# Altium PCB Main_pcb.PcbDoc
Units mil, origin at the board's own origin, x right, y up, seen from the top; angles counter-clockwise.
Board outline 3140 x 2665 mil, 2 copper layers (Top Layer, Bottom Layer); 26 components, 35 nets, 136 pads, 7 vias.
Unrouted connection lines stored in the file: 1.
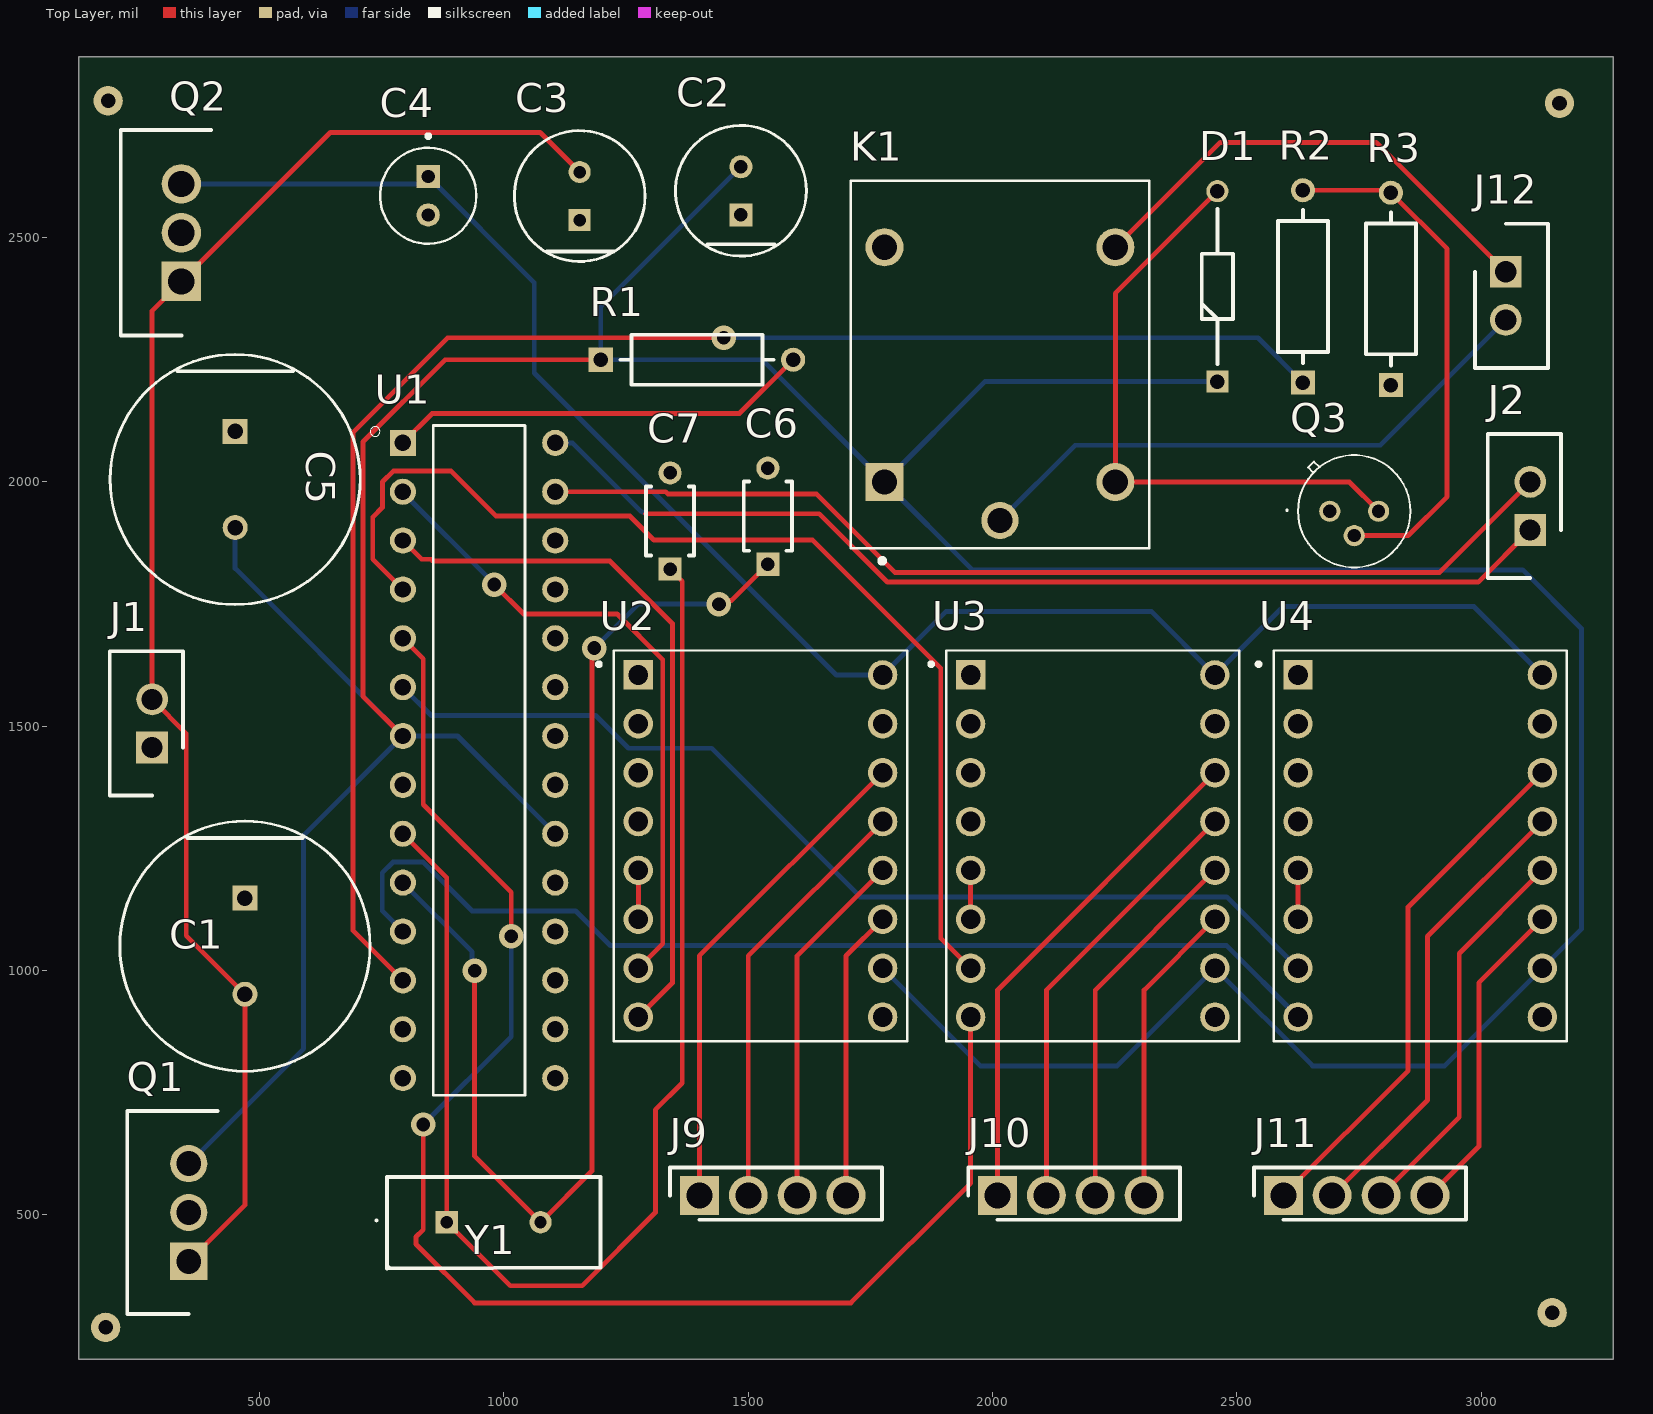
[diagram p0: Top Layer view]
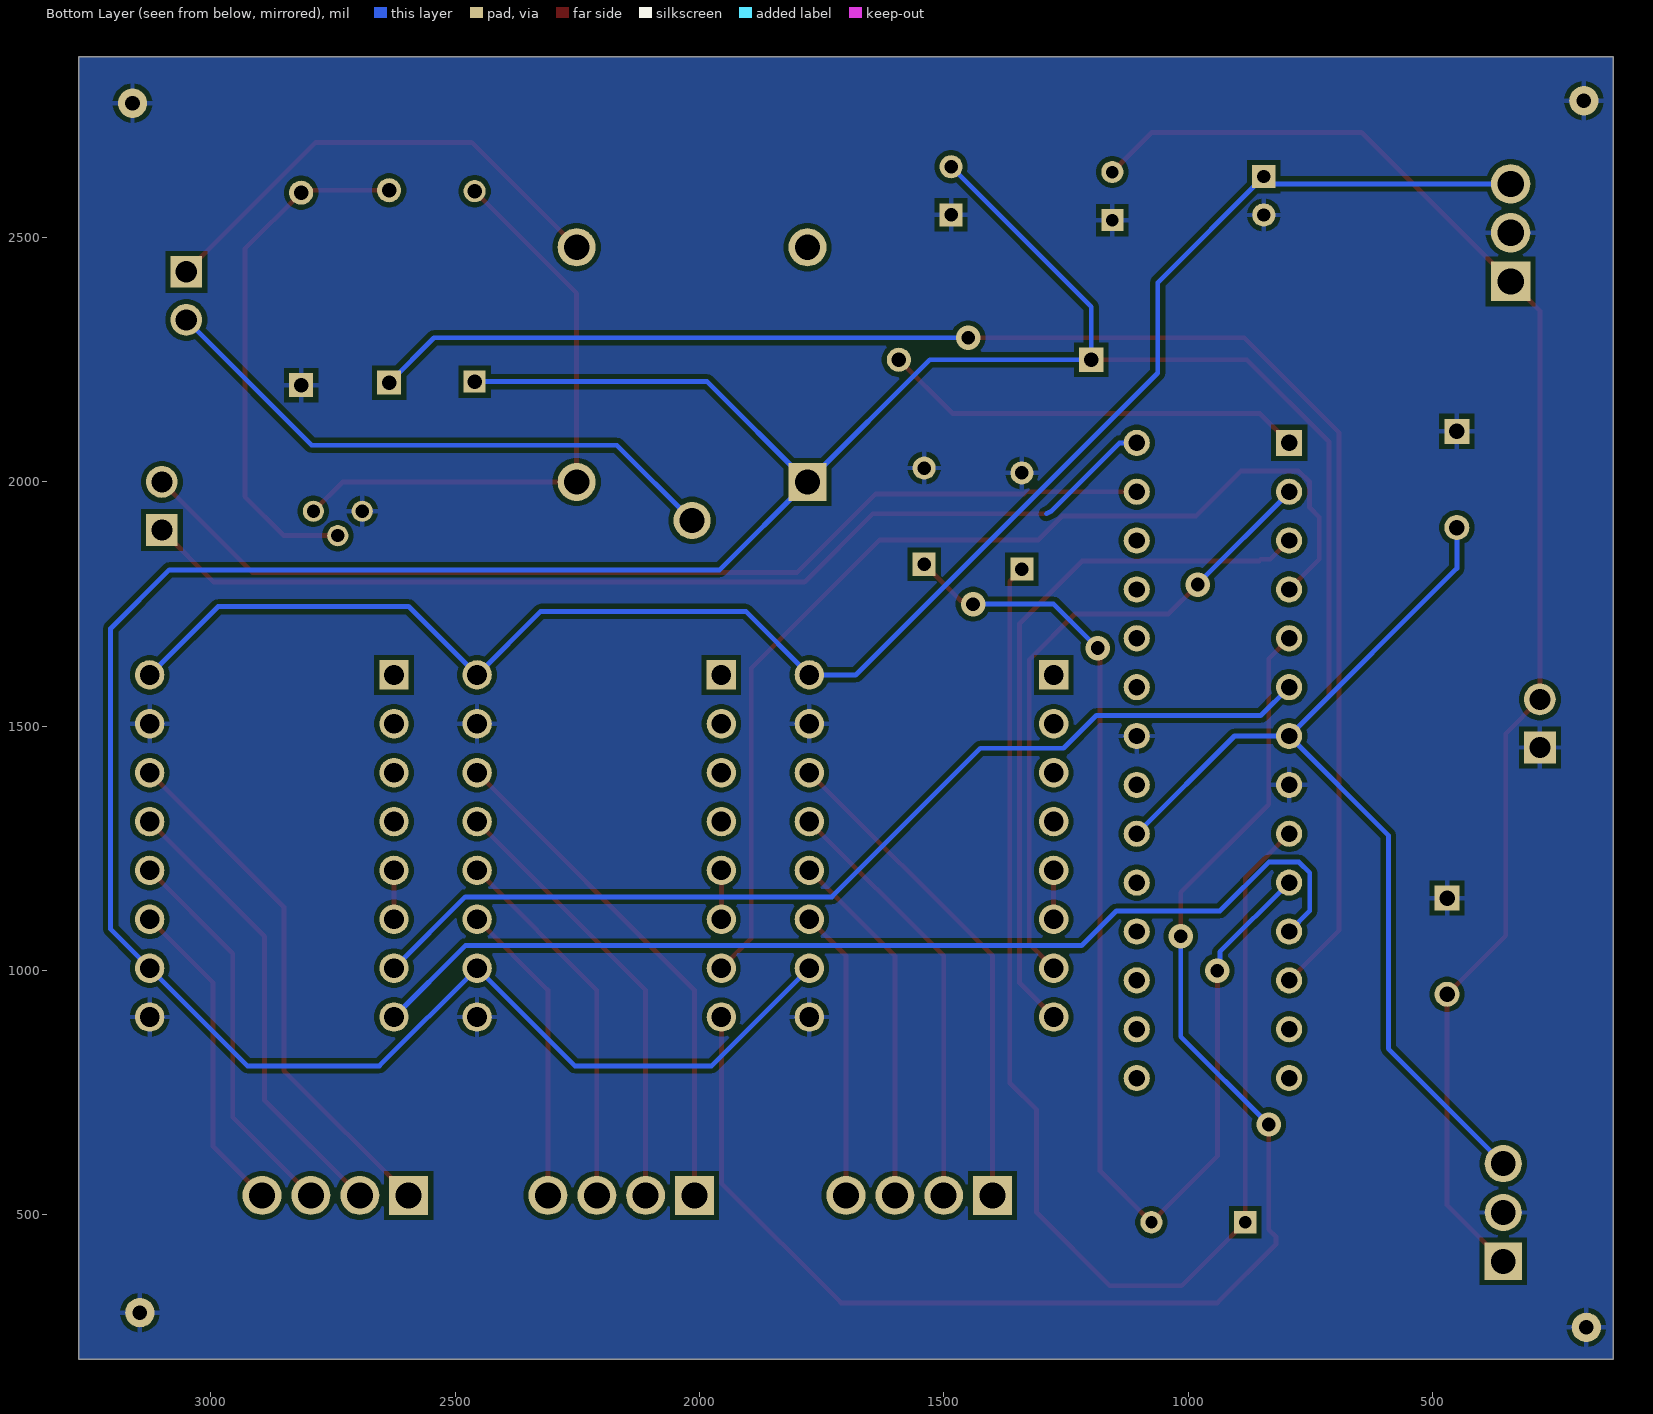
[diagram p1: Bottom Layer view, seen from below]
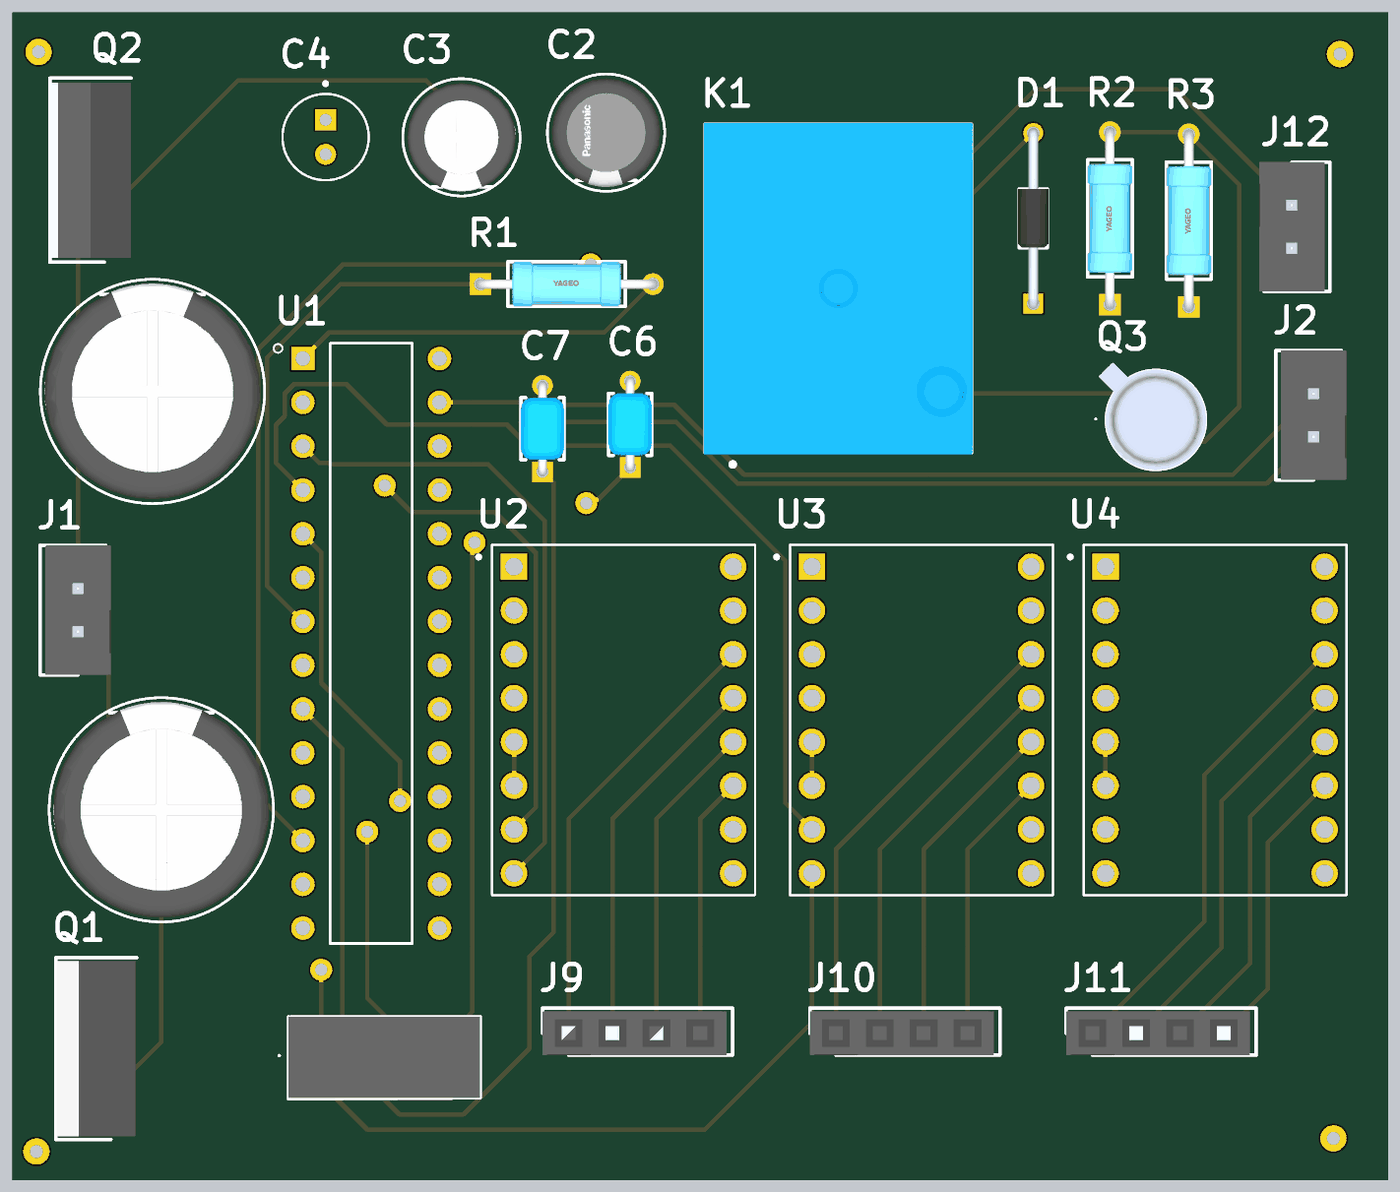
[diagram p2: 3D render of the assembled board from above, using the file's embedded part models]

## Layer stack, top to bottom
Top Solder: solder mask 0.4, Solder Resist, Dk 3.5
Top Layer: signal copper 1.4
Dielectric 1: dielectric 12.6, FR-4, Dk 4.8
Bottom Layer: signal copper 1.4
Bottom Solder: solder mask 0.4, Solder Resist, Dk 3.5

## Board outline
130,205 3270,205 3270,2870 130,2870

## Design rules (kind name [scope] priority, off if disabled: settings)
Clearance [All] p1: gap=10 ignorepadtopadclearanceinfootprint=FALSE except(0: Arc-Hole Track-Hole SMDPad-Hole THPad-Hole Via-Hole Fill-Hole Poly-Hole Region-Hole Text-Hole)
PolygonConnect [All] p1: connectstyle=Relief reliefconductorwidth=10 reliefentries=4 polygonreliefangle="90 Angle" airgapwidth=10
RoutingVias [All] p1: holewidth=28 width=50 viastyle="Through Hole" minholewidth=28 minwidth=50 maxholewidth=28 maxwidth=50
SolderMaskExpansion [All] p1: expansion=4 istentingtop=FALSE
Width [All] p1: maxlimit=10 minlimit=10 preferedwidth=10
30 further rules are at their usual default settings.

## Classes and differential pairs
component class U_Relay: D1 K1 Q3 R2 R3
component class U_microcontroller: C5 C6 C7 R1 U1 Y1
component class U_A4988_motor_drivers: U2 U3
component class U_Power_circuit: C1 C2 C3 C4 Q1 Q2
component class Main_Schematic: J1 J2 J9 J10 J11 J12

## Components (designator, comment, footprint, x,y, rotation, side; value= is the part's Value field where it differs from the comment)
C1 "10uF" FP-RAD-TH-D_12_5_0_5-L_20-MFG 470,1050 r270 top
C2 "1uF" FP-ECA-2CHG010I-MFG 1485,2595.79 r90 top
C3 "100uF" FP-RAD-TH-D_6_3_0_5-L_7_1-MFG 1155,2585 r90 top
C4 "0.1uF" CAPPRD200W50D550H1250 845,2585.63 r270 top
C5 "10uF" FP-RAD-TH-D_12_5_0_5-L_20-MFG 450,2005 r270 top
C6 "22pF" FP-RCE0K1-MFG 1540,1930 r90 top
C7 "22pF" FP-RCE0K1-MFG 1340,1920 r90 top
D1 "1N4148TR" DIOAD990W55L340D162 2460,2205.24 r90 top
J1 "12V" SHDR2W64P0X250_1X2_750X380X600P 280,1456.57 r90 top
J2 "I2C" SHDR2W64P0X250_1X2_750X380X600P 3100,1901.57 r90 top
J9 "Motor_1" RHDR4W80P0X254_1X4_1066X254X850P 1400,540 r0 top
J10 "Motor_2" RHDR4W80P0X254_1X4_1066X254X850P 2010,540 r0 top
J11 "Motor_3" RHDR4W80P0X254_1X4_1066X254X850P 2595,540 r0 top
J12 "coil" SHDR2W64P0X250_1X2_750X380X600P 3050,2430 r270 top
K1 "SRD-05VDC-SL-C" RELAY_SRD-05VDC-SL-C 2015,2240 r90 top
Q1 "LM7805CT" TO254P470X1028X1955-3P 355,405 r90 top
Q2 "LM7809CT" TO254P470X1016X2019-3P 340,2410.2 r90 top
Q3 "BC109C" CENTRAL_TO18 2740,1940 r0 top
R1 "1k" FP-MFR-25-MFG 1395,2250 r0 top value=1.18kΩ
R2 "1k" FP-MFR-25-MFG 2635,2400 r90 top value=1.18kΩ
R3 "10k" FP-MFR-25-MFG 2815,2395 r90 top value=1.18kΩ
U1 "ATMEGA328P-PU" DIP794W46P254L2967H457Q28B 949.09,1430 r0 top
U2 "A4988_STEPPER_MOTOR_DRIVER_CARRIER" MODULE_A4988_STEPPER_MOTOR_DRIVER_CARRIER 1525,1255 r0 top
U3 "A4988_STEPPER_MOTOR_DRIVER_CARRIER" MODULE_A4988_STEPPER_MOTOR_DRIVER_CARRIER 2205,1255 r0 top
U4 "A4988_STEPPER_MOTOR_DRIVER_CARRIER" MODULE_A4988_STEPPER_MOTOR_DRIVER_CARRIER 2875,1255 r0 top
Y1 "oscilator" HC49USFF5F1816000MHZ 882.87,485 r0 top

## Footprints (in the part's own frame and the unit in brackets; to place one, negate y for a bottom-side part, rotate by r counter-clockwise, add the part's x,y. Pads: shape width x height; smd on the part's side, far side on the other; paste and mask are expansions set on the pad)
CAPPRD200W50D550H1250 [mm]
  rect 1.208x1.208 hole 0.7: 1(-1,0)
  round 1.208 hole 0.7: 2(1,0)
  silkscreen extent -3.2,-2.5 2.5,2.5
CENTRAL_TO18 [mm]
  round 1.1 hole 0.68: 1(-1.27,0) 2(0,-1.27) 3(1.27,0)
  silkscreen extent -3.53,-2.92 2.92,2.92, body extent -3.34,-2.92 2.91,3.34, height 5.63
DIOAD990W55L340D162 [mm]
  rect 1.15x1.15 hole 0.75: 1(0,0)
  round 1.15 hole 0.75: 2(9.9,0)
  silkscreen extent 0.93,-0.81 8.97,0.81, body extent -0.28,-0.87 10.18,0.87, height 1.75
DIP794W46P254L2967H457Q28B [mm]
  rect 1.358x1.358 hole 0.85: 1(-3.96,16.51)
  round 1.358 hole 0.85: 2(-3.96,13.97) 3(-3.96,11.43) 4(-3.96,8.89) 5(-3.96,6.35) 6(-3.96,3.81) 7(-3.96,1.27) 8(-3.96,-1.27) 9(-3.96,-3.81) 10(-3.96,-6.35) 11(-3.96,-8.89) 12(-3.96,-11.43) 13(-3.96,-13.97) 14(-3.96,-16.51) 15(3.96,-16.51) 16(3.96,-13.97) 17(3.96,-11.43) 18(3.96,-8.89) 19(3.96,-6.35) 20(3.96,-3.81) 21(3.96,-1.27) 22(3.96,1.27) 23(3.96,3.81) 24(3.96,6.35) 25(3.96,8.89) 26(3.96,11.43) 27(3.96,13.97) 28(3.96,16.51)
  silkscreen extent -5.65,-17.4 2.38,17.4
FP-ECA-2CHG010I-MFG [mm]
  rect 1.2x1.2 hole 0.7 paste-1000 mask+0: 1(-1.25,0)
  round 1.2 hole 0.7 paste-1000 mask+0: 2(1.25,0)
  silkscreen extent -3.4,-3.4 3.4,3.4, body extent -3.5,-3.5 3.5,3.5, height 0.25
FP-MFR-25-MFG [mm]
  rect 1.25x1.25 hole 0.75 paste-1000 mask+0: 1(-5,0)
  round 1.25 hole 0.75 paste-1000 mask+0: 2(5,0)
  silkscreen extent -3.97,-1.3 3.97,1.3, body extent -5.72,-1.4 5.72,1.4, height 0.25
FP-RAD-TH-D_6_3_0_5-L_7_1-MFG [mm]
  rect 1.15x1.15 hole 0.65 paste-1000 mask+0: 1(-1.25,0)
  round 1.15 hole 0.65 paste-1000 mask+0: 2(1.25,0)
  silkscreen extent -3.4,-3.4 3.4,3.4, body extent -3.5,-3.5 3.5,3.5, height 0.25
FP-RAD-TH-D_12_5_0_5-L_20-MFG [mm]
  rect 1.3x1.3 hole 0.8 paste-1000 mask+0: 1(-2.5,0)
  round 1.3 hole 0.8 paste-1000 mask+0: 2(2.5,0)
  silkscreen extent -6.5,-6.5 6.5,6.5, body extent -6.6,-6.6 6.6,6.6, height 0.25
FP-RCE0K1-MFG [mm]
  rect 1.2x1.2 hole 0.7 paste-1000 mask+0: 1(-2.5,0)
  round 1.2 hole 0.7 paste-1000 mask+0: 2(2.5,0)
  silkscreen extent -1.8,-1.25 1.8,1.25, body extent -3.2,-1.35 3.2,1.35, height 0.25
HC49USFF5F1816000MHZ [mm]
  rect 1.155x1.155 hole 0.63: 1(0,0)
  round 1.155 hole 0.63: 2(4.88,0)
  silkscreen extent -3.7,-2.4 8,2.35, body extent -3.11,-2.35 7.99,2.35, height 3.6
MODULE_A4988_STEPPER_MOTOR_DRIVER_CARRIER [mm]
  rect 1.53x1.53 hole 1.02: 1(-6.35,8.89)
  round 1.53 hole 1.02: 2(-6.35,6.35) 3(-6.35,3.81) 4(-6.35,1.27) 5(-6.35,-1.27) 6(-6.35,-3.81) 7(-6.35,-6.35) 8(-6.35,-8.89) 9(6.35,-8.89) 10(6.35,-6.35) 11(6.35,-3.81) 12(6.35,-1.27) 13(6.35,1.27) 14(6.35,3.81) 15(6.35,6.35) 16(6.35,8.89)
  silkscreen extent -8.5,-10.16 7.62,10.16
RELAY_SRD-05VDC-SL-C [mm]
  rect 1.98x1.98 / inner round 1.98 / far side rect 1.98x1.98 hole 1.32: A1(-6.1,6)
  round 1.98 hole 1.32: A2(-6.1,-6) NC(6.1,6) NO(6.1,-6)
  round 1.935 hole 1.29: COM(-8.1,0)
  silkscreen extent -10.3,-7.75 9.55,7.75, body extent -9.6,-7.8 9.6,7.8, height 15.8
RHDR4W80P0X254_1X4_1066X254X850P [mm]
  rect 2.025x2.025 hole 1.35: 1(0,0)
  round 2.025 hole 1.35: 2(2.54,0) 3(5.08,0) 4(7.62,0)
  silkscreen extent -1.52,-1.27 9.49,1.46, body extent -1.52,-1.27 9.14,1.27, height 8.5
SHDR2W64P0X250_1X2_750X380X600P [mm]
  rect 1.65x1.65 hole 1.1: 1(0,0)
  round 1.65 hole 1.1: 2(2.5,0)
  silkscreen extent -2.5,-1.6 5,2.2, body extent -2.5,-1.9 5,1.9, height 6
TO254P470X1016X2019-3P [mm]
  rect 2.055x2.055 hole 1.37: 1(0,0)
  round 2.055 hole 1.37: 2(2.535,0) 3(5.07,0)
  silkscreen extent -2.8,-1.55 7.87,3.15, body extent -2.55,-1.55 7.61,3.15, height 18.54
TO254P470X1028X1955-3P [mm]
  rect 1.935x1.935 hole 1.29: 1(0,0)
  round 1.935 hole 1.29: 2(2.54,0) 3(5.08,0)
  silkscreen extent -2.73,-1.5 7.81,3.2, body extent -2.54,-1.43 7.62,3.14, height 19.38

## Part data
C1 C5: library part CMP-05427-000861-1, "Aluminum Electrolytic Capacitors (Radial Lead Type) 10uF ±20% 450V", Case/Package=Radial, Dielectric Material=Aluminium, Max Operating Temperature=105°C, Min Operating Temperature=-25°C, Package Quantity=200, Ripple Current=350mA, Tolerance=20%, Voltage=450V, Capacitance=10uF, Construction=RADIAL, Contact Plating=Tin, Diameter=12.5mm, Dissipation Factor=0.24%, Height=20mm, Height - Seated (Max)=0.787inch, Lead Diameter=0.6mm, Lead Free="Lead Free", Lead Pitch=5mm, Length=20mm, Life (Hours)=10000Hour, Mount="Through Hole", Number of Pins=2, Packaging=Bulk, Polarity=Polar, Radiation Hardening=No, REACH SVHC="No SVHC", Ripple Current (AC)=350mA, RoHS Compliant=Yes, Series=ED, Termination=Radial, Voltage Rating=450V, Voltage Rating (DC)=450V
C2: library part CMP-05427-002176-1, "CAP ALUM 1UF 20% 160V RADIAL", Case/Package=Radial, Max Operating Temperature=105°C, Min Operating Temperature=-25°C, Package Quantity=2000, Ripple Current=17mA, Tolerance=20%, Voltage Rating=160V, Capacitance=1uF, Diameter=6.3mm, Height=11.2mm, Height - Seated (Max)=0.48inch, Lead Pitch=2.5mm, Lead/Base Style=Straight, Length=11.2mm, Life (Hours)=2000Hour, Mount="Through Hole", Packaging="Ammo Pack", Radiation Hardening=No, RoHS Compliant=Yes, Series=NHG, Termination=Radial, Voltage Rating (DC)=160V
C3: library part CMP-05427-001316-1, "Aluminum Electrolytic Capacitors (Radial Lead Type) 100uF ±20% 16V", Case/Package=Radial, Max Operating Temperature=85°C, Min Operating Temperature=-40°C, Package Quantity=2000, Ripple Current=91mA, Tolerance=20%, Voltage=16V, Capacitance=100uF, Diameter=6.3mm, Height=7mm, Height - Seated (Max)=0.315inch, Lead Diameter=0.45mm, Lead Pitch=2.5mm, Length=7mm, Life (Hours)=1000Hour, Mount="Through Hole", Packaging="Tape and Reel", Polarity=Polar, Radiation Hardening=No, RoHS Compliant=Yes, Series=KA, Termination=Radial, Voltage Rating=16V, Voltage Rating (DC)=16V
C4: library part UVR1H0R1MDD, "0.1ÂµF 50V Aluminum Electrolytic Capacitors Radial, Can 2000 Hrs @ 85Â°C", Package="Radial Nichicon", Availability=Warning, DigiKey-Purchase-URL=https://snapeda.com/shop?store=DigiKey&id=1435228, MF=Nichicon, Mouser-Purchase-URL=https://snapeda.com/shop?store=Mouser&id=1435228, MP=UVR1H0R1MDD, Price=None, SnapEDA_Link=https://www.snapeda.com/parts/UVR1H0R1MDD/Nichicon/view-part/1435228/?ref=snap
C6 C7: library part CMP-06035-004895-1, "Cap Ceramic 22pF 50V C0G ±5% Radial 5mm +125°C Automotive Bulk", Case/Package=Radial, Dielectric=C0G, Max Operating Temperature=125°C, Min Operating Temperature=-55°C, Package Quantity=2000, Ratings=AEC-Q200, Resistor Type=Ceramic, Tolerance=5%, Voltage Rating=50V, Capacitance=22pF, Height=3.5mm, Height - Seated (Max)=0.138inch, Lead Diameter=0.5mm, Lead Pitch=0.197inch, Lead/Base Style="Formed Leads", Length=0.142inch, Mount="Through Hole", Packaging="Tape and Reel", Termination=Radial, Voltage Rating (DC)=50V, Width=0.098inch
D1: "Diode", Manufacturer_Name=Vishay, Mouser Part Number=78-1N4148, Arrow Part Number=1N4148TR, Arrow Price/Stock=https://www.arrow.com/en/products/1n4148tr/vishay?region=nac, Datasheet Link=https://www.vishay.com/docs/81857/1n4148.pdf, Manufacturer_Part_Number=1N4148TR, Mouser Price/Stock=https://www.mouser.co.uk/ProductDetail/Vishay-Semiconductors/1N4148TR?qs=HfDODkYFUverVKi%2FJ%2Fe5IA%3D%3D
J1 J2 J12: library part B2B-EH-A, "Connector", Manufacturer_Name="JST (JAPAN SOLDERLESS TERMINALS)", Datasheet Link=http://www.jst-mfg.com/product/pdf/eng/eEH.pdf, Height=6mm, Manufacturer_Part_Number=B2B-EH-A
J9 J10 J11: library part PPPC041LFBN-RC, "Connector", Manufacturer_Name=Sullins, Datasheet Link=https://drawings-pdf.s3.amazonaws.com/10492.pdf, Height=8.5mm, Manufacturer_Part_Number=PPPC041LFBN-RC
K1: "5V Trigger Relay Module For Arduino And Raspberry Pi 5V Trigger Relay Module For Arduino And Raspberry Pi", Package="NON STANDARD-5 Songle Relay", Availability="Not in stock", Check_prices=https://www.snapeda.com/parts/SRD-05VDC-SL-C/Songle+Relay/view-part/?ref=eda, MF="Songle Relay", MP=SRD-05VDC-SL-C, Price=None, SnapEDA_Link=https://www.snapeda.com/parts/SRD-05VDC-SL-C/Songle+Relay/view-part/?ref=snap
Q1: "Integrated Circuit", Manufacturer_Name="Texas Instruments", Mouser Part Number=926-LM7805CT, Arrow Part Number=LM7805CT, Arrow Price/Stock=https://www.arrow.com/en/products/lm7805ct/texas-instruments?region=europe, Datasheet Link=http://www.ti.com/lit/ds/symlink/lm340.pdf, Height=4.7mm, Manufacturer_Part_Number=LM7805CT, Mouser Price/Stock=https://www.mouser.co.uk/ProductDetail/Texas-Instruments/LM7805CT?qs=QbsRYf82W3EaqXeMDVwIfQ%3D%3D
Q2: "Power Supply", Manufacturer_Name=onsemi, Mouser Part Number=512-LM7809CT, Arrow Part Number=LM7809CT, Arrow Price/Stock=https://www.arrow.com/en/products/lm7809ct/on-semiconductor?region=europe, Datasheet Link=https://mouser.componentsearchengine.com/Datasheets/2/LM7809CT.pdf, Height=4.7mm, Manufacturer_Part_Number=LM7809CT, Mouser Price/Stock=https://www.mouser.co.uk/ProductDetail/ON-Semiconductor-Fairchild/LM7809CT?qs=VOMQJJE%252BBNmmTueoZonUjQ%3D%3D
Q3: "Transistor BJT NPN", Manufacturer_Name="Central Semiconductor", Mouser Part Number=610-BC109C, Datasheet Link=https://my.centralsemi.com/get_document.php?cmp=1&mergetype=pd&mergepath=pd&pdf_id=BC107.PDF, Manufacturer_Part_Number=BC109C, Mouser Price/Stock=https://www.mouser.com/Search/Refine.aspx?Keyword=610-BC109C
R1 R2 R3: library part CMP-03413-000001-1, "RES 1.18K OHM 1/4W 1% AXIAL", Manufacturer=Yageo, Manufacturer Part Number=MFR-25FBF52-1K18, Package=MFR-25, Power Rating=0.25W, Resistance=1.18kΩ, Temperature="-55°C to +155°C", Temperature Coefficient=100ppm/°C, Temperature Range High=+155°C, Temperature Range Low=-55°C, Tolerance=1%, Voltage Rating=250V, Automotive=No, Category=Res, ComponentLink2Description=Datasheet, ComponentLink2URL=https://www.yageo.com/upload/media/product/products/datasheet/lr/Yageo_LR_MFR_1.pdf, Composition="Metal Film", Device Class L1="Passive Components", Device Class L2=Resistors, Device Class L3="Through-Hole Resistors", Digikey Description="RES 1.18K OHM 1/4W 1% AXIAL", Height=2.6mm, Ipc Land Pattern Name=RESAD1000W75L680D260, Lead Free=Yes, Mouser Description="Metal Film Resistors 1.18K OHM 1/4W 1%", Octopart=https://octopart.com/mfr-25fbf52-1k18-yageo-56251681, RoHS=TRUE, Series=MFR
U1: "ATmega Series 20 MHz 32 KB Flash 2 KB SRAM 8-Bit Microcontroller - DIP-28", Package=None, Availability=Unavailable, MP=ATMEGA328P-PU, Price=None
U2 U3 U4: "Stepper motor controler; IC: A4988; 1A; Uin mot: 8Ã·35V", Package=None, Availability=Unavailable, MP=A4988_STEPPER_MOTOR_DRIVER_CARRIER, Price=None
Y1: library part HC49US-FF5F18-16.000MHZ, "Crystal or Oscillator", Manufacturer_Name="ILSI AMERICA", Datasheet Link=https://abracon.com/datasheets/ILSI/HC49US.pdf, Height=3.5mm, Manufacturer_Part_Number=HC49US-FF5F18-16.000MHZ

## Free pads (board coordinates)
  round 60 hole 30: 2(3160,2775) 3(3145,300) 4(185,270) 5(190,2780)

## Via types
v1: diameter 50, hole 28, Top Layer to Bottom Layer, 7 vias

## Nets (pads, with @x,y where several pads share a name; then routed paths per layer and width w, separated by ;. In a path a pad name is that pad's centre, name@x,y a point inside that pad or via, vN(x,y) a via of type N, cw(c..) or ccw(c..) an arc to the next point about the centre after c; other vN are vias at no path point)
GND: C1.1 C2.1 C3.1 C4.2 C5.1 C6.2 C7.2 J1.1 pad.2 pad.3 pad.4 pad.5 Q1.2 Q2.2 Q3.1 R3.1 U1.8 U1.22 U2.9 U2.15 U3.9 U3.15 U4.9 U4.15
NetC1_2: C1.2 C3.2 J1.2 Q1.1 Q2.1 | length 3131.1
  Top Layer w10: Q1.1 470,520 C1.2 350,1071.57 350,1485 J1.2 280,2350.2 Q2.1 644.8,2715 1074.21,2715 C3.2
NetC6_1: C6.1 U1.10 Y1.2 | length 2458.4
  Top Layer w10: v1(940,1000) 940,620 Y1.2 1180,590 1180,1655 v1(1185,1660) ; v1(1440,1750) 1447.65,1757.65 1466.08,1757.65 C6.1
  Bottom Layer w10: U1.10 934.86,1038.33 934.86,1005.14 v1(940,1000) ; v1(1185,1660) 1275,1750 v1(1440,1750)
NetC7_1: C7.1 U1.9 Y1.1 | length 2725
  Top Layer w10: U1.9 882.87,1190.32 Y1.1 1012.87,355 1160,355 1310,505 1310,715 1365,770 1365,1796.57 C7.1
NetD1_2: D1.2 K1.A2 Q3.3 | length 1245.2
  Top Layer w10: D1.2 2251.22,2386.22 K1.A2 2730.16,1999.84 Q3.3
NetJ2_1: J2.1 U1.28 | length 2156.3
  Top Layer w10: 1290,1935 1645,1935 1785,1795 2993.43,1795 J2.1
  Bottom Layer w10: U1.28 1140,2080 1280,1940 1290,1935
NetJ2_2: J2.2 U1.27 | length 2140
  Top Layer w10: U1.27 1331,1980 1336,1975 1640,1975 1800,1815 2915,1815 J2.2
NetJ9_1: J9.1 U2.14 | length 1020.3
  Top Layer w10: J9.1 1400,1030 U2.14
NetJ9_2: J9.2 U2.13 | length 878.9
  Top Layer w10: J9.2 1500,1030 U2.13
NetJ9_3: J9.3 U2.12 | length 737.5
  Top Layer w10: J9.3 1600,1030 U2.12
NetJ9_4: J9.4 U2.11 | length 596.1
  Top Layer w10: J9.4 1700,1030 U2.11
NetJ10_1: J10.1 U3.14 | length 1049.3
  Top Layer w10: J10.1 2010,960 U3.14
NetJ10_2: J10.2 U3.13 | length 907.9
  Top Layer w10: J10.2 2110,960 U3.13
NetJ10_3: J10.3 U3.12 | length 766.5
  Top Layer w10: J10.3 2210,960 U3.12
NetJ10_4: J10.4 U3.11 | length 625.1
  Top Layer w10: J10.4 2310,960 U3.11
NetJ11_1: J11.1 U4.14 | length 1084.5
  Top Layer w10: J11.1 2850.19,795.19 2850.19,1130.19 U4.14
NetJ11_2: J11.2 U4.13 | length 943.1
  Top Layer w10: J11.2 2890,735 2890,1070 U4.13
NetJ11_3: J11.3 U4.12 | length 801.7
  Top Layer w10: J11.3 2955,700 2955,1035 U4.12
NetJ11_4: J11.4 U4.11 | length 660.3
  Top Layer w10: J11.4 2995,640 2995,975 U4.11
NetJ12_1: J12.1 K1.NO | length 997.5
  Top Layer w10: K1.NO 2466.06,2695 2785,2695 J12.1
NetJ12_2: J12.2 K1.COM | length 1205
  Bottom Layer w10: K1.COM 2168.9,2075 2793.43,2075 J12.2
NetQ3_2: Q3.2 R2.2 R3.2 | length 1074.7
  Top Layer w10: R2.2 2810,2596.85 R3.2 2930,2476.85 2930,1970 2850,1890 Q3.2
NetR1_2: R1.2 U1.1 | length 869.1
  Top Layer w10: U1.1 853.19,2140 1481.85,2140 R1.2
NetR2_1: R2.1 U1.12 | length 3225.5
  Top Layer w10: U1.12 691.46,1081.73 691.46,2101.73 884.72,2295 v1(1450,2295)
  Bottom Layer w10: v1(1450,2295) 2543.15,2295 R2.1
NetU1_2: U1.2 U2.7 | length 1328.1
  Top Layer w10: v1(980,1790) 1040,1730 1231.45,1730 1325,1636.45 1325,1055 U2.7
  Bottom Layer w10: U1.2 793.19,1978.41 980,1791.59 v1(980,1790)
NetU1_3: U1.3 U2.8 | length 1456.2
  Top Layer w10: U1.3 831.46,1841.73 851.38,1841.73 854.92,1838.19 1216.81,1838.19 1345,1710 1345,975 U2.8
NetU1_4: U1.4 U3.7 | length 2211.7
  Top Layer w10: U1.4 731.46,1841.73 731.46,1928 751.46,1948 751.46,2000 773.46,2022 892,2022 984,1930 1258,1930 1307,1881 1632,1881 1894,1619 1894,1066 U3.7
NetU1_5: U1.5 U3.8 | length 3038.8
  Top Layer w10: U1.5 835,1638.19 835,1340 1015,1160 v1(1015,1070) ; v1(835,685) 835,470 820,455 820,440 940,320 1710,320 1955,565 U3.8
  Bottom Layer w10: v1(835,685) 1015,865 v1(1015,1070)
NetU1_6: U1.6 U4.7 | length 2070
  Bottom Layer w10: U1.6 851.19,1522 1188,1522 1255,1455 1425,1455 1729,1151 2479,1151 U4.7
NetU1_11: U1.11 U4.8 | length 2151.9
  Bottom Layer w10: U1.11 751,1122.19 751,1200 773,1222 835,1222 935,1122 1147,1122 1218,1051 2479,1051 U4.8
NetU2_5: U2.5 U2.6 | length 100
  Top Layer w10: U2.6 U2.5
NetU3_5: U3.5 U3.6 | length 100
  Top Layer w10: U3.6 U3.5
NetU4_5: U4.5 U4.6 | length 100
  Top Layer w10: U4.6 U4.5
VCC: C2.2 C5.2 D1.1 K1.A1 Q1.3 R1.1 U1.7 U1.20 U2.10 U3.10 U4.10 | length 9136.2
  Top Layer w10: U1.7 711.46,1561.73 711.46,2081.73 879.72,2250 R1.1
  Bottom Layer w10: Q1.3 590,840 590,1276.81 U1.7 ; C5.2 450,1823.19 U1.7 ; U1.20 905,1480 U1.7 ; C2.2 1198.15,2358.15 R1.1 1528.62,2250 K1.A1 ; U2.10 1975,805 2255,805 U3.10 2655,805 2925,805 U4.10 3205,1085 3205,1700 3085,1820 1958.62,1820 K1.A1 ; D1.1 1984.17,2205.24 K1.A1
VCC_Moter: C4.1 Q2.3 U2.16 U3.16 U4.16 | length 3545.8
  Bottom Layer w10: Q2.3 829.8,2609.8 C4.1 1062.07,2407.93 1062.07,2222.93 1680,1605 U2.16 1905,1735 2325,1735 U3.16 2595,1745 2985,1745 U4.16
pads on no net: K1.NC U1.13 U1.14 U1.15 U1.16 U1.17 U1.18 U1.19 U1.21 U1.23 U1.24 U1.25 U1.26 U2.1 U2.2 U2.3 U2.4 U3.1 U3.2 U3.3 U3.4 U4.1 U4.2 U4.3 U4.4

## Polygon pours and split planes (outlines as drawn)
GND on Bottom Layer "GND_L02_P000" (solid, pour order 0): 130,205 3270,205 3270,2870 130,2870